# Altium PCB AICat V1.2.PcbDoc (part 2 of 2)
Units mil, origin at the board's own origin, x right, y up, seen from the top; angles counter-clockwise.
Board outline 6000 x 4000 mil, 2 copper layers (Top Layer, Bottom Layer); 86 components, 79 nets, 277 pads, 197 vias.
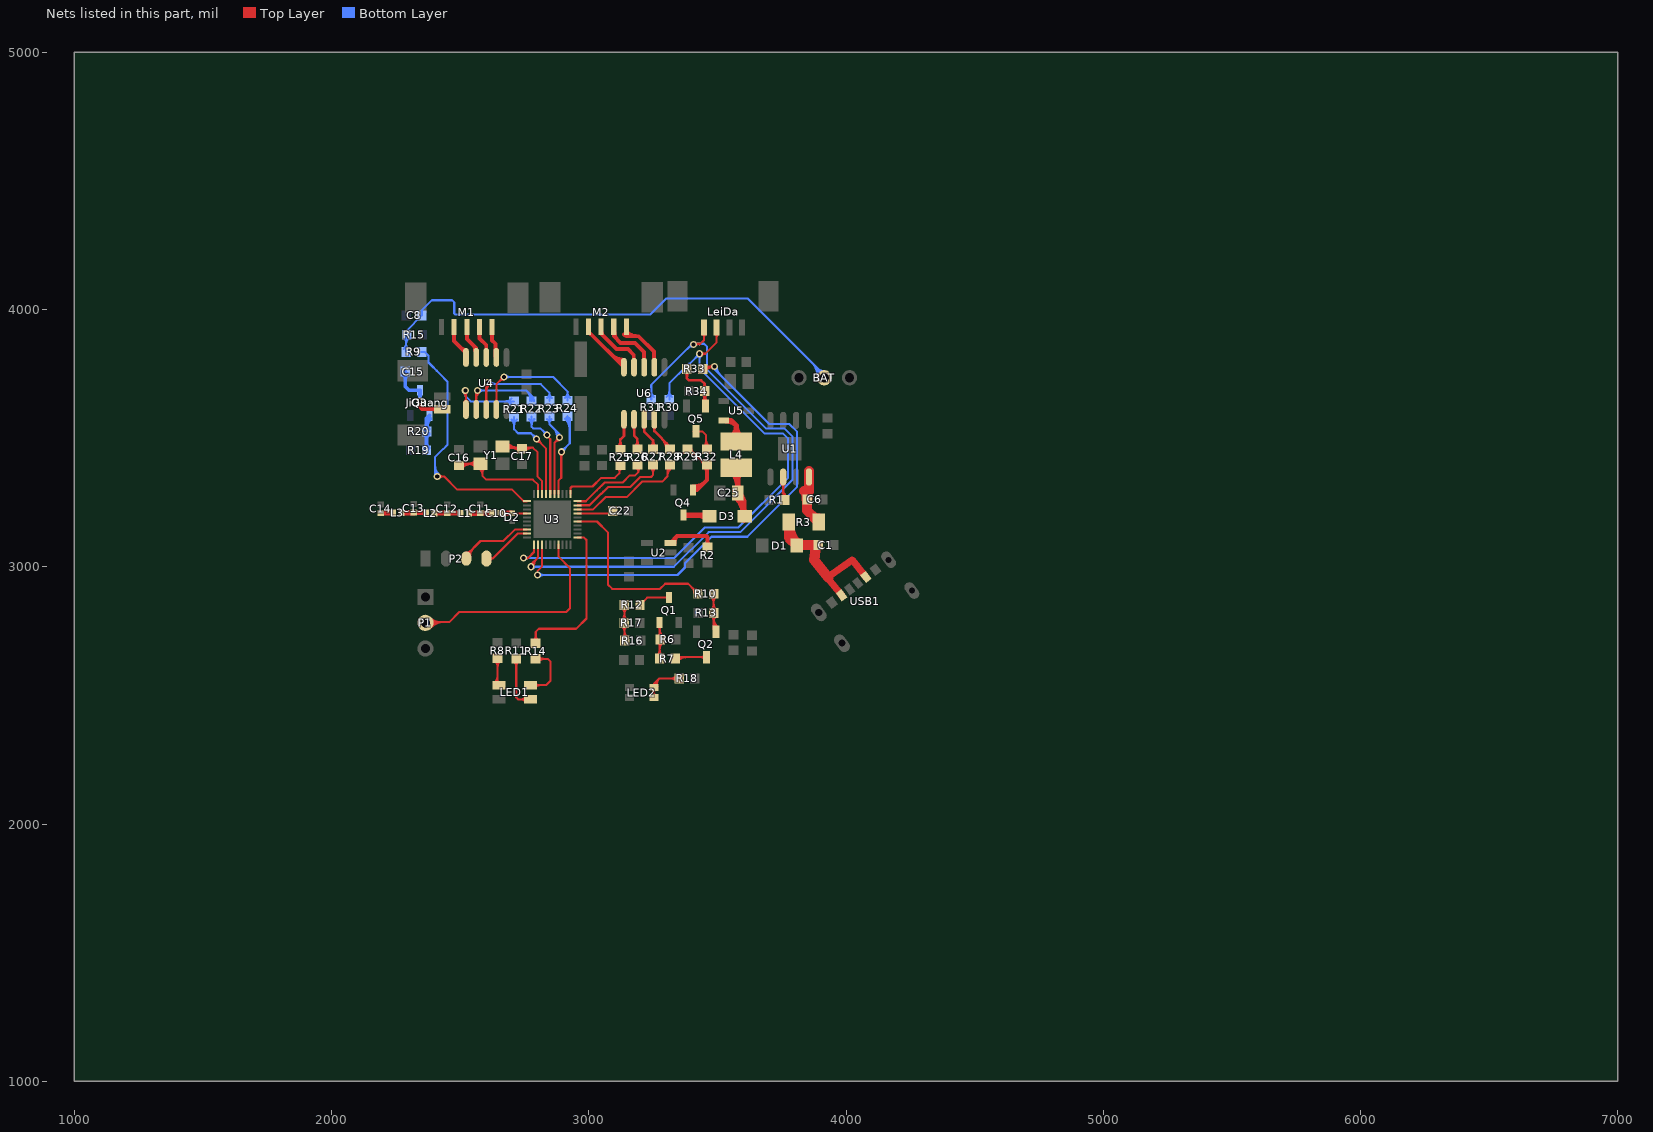
[diagram p2: the nets of this part, all layers, seen from the top]

## Via types
v1: diameter 27.56, hole 15.75, Top Layer to Bottom Layer, tented both sides, 194 vias
v2: diameter 27.56, hole 15.75, Top Layer to Bottom Layer, 3 vias

## Nets (pads, with @x,y where several pads share a name; then routed paths per layer and width w, separated by ;. In a path a pad name is that pad's centre, name@x,y a point inside that pad or via, vN(x,y) a via of type N, cw(c..) or ccw(c..) an arc to the next point about the centre after c; other vN are vias at no path point) (continued)
LED_R: R14.2 U3.11 | length 661.1
  Top Layer w8: R14.2@2783.87,2712.43 ccw(c2759.41,2736.89) 2794,2736.89 ; R14.2@2793,2702.32 2794,2703.32 2794,2747 2806,2759 2951,2759 2991,2799 2991,3104 2981.96,3113.04 U3.11@2956.55,3113.04 ; 2794,2736.82 ccw(c2828.49,2736.82) R14.2@2804.1,2712.43
LEIDA_CON: R33.2 U3.3 | length 2164.5
  Top Layer w8: 2801,2984 2818.78,3001.78 U3.3@2818.78,3085.51 ; R33.2@3437.32,3777 3438.32,3778 v1(3488,3778) ccw(c3488,3734.4) R33.2@3453.6,3761.19 ; R33.2@3447.29,3766.11 cw(c3471.63,3747.16) 3471.63,3778 ; v1@3481.08,3771.08 ccw(c3464.39,3754.39) 3464.39,3778 ccw(c3464.39,3801.61) v1@3481.08,3784.92
  Bottom Layer w8: v1(2801,2968) 3345,2968 3374,2997 3374,3013.49 3477.19,3116.68 3616,3116.68 3809.78,3310.46 3809.78,3525 3779.78,3555 3702,3555 3488,3769 v1(3488,3778) ; v1@2807.92,2961.08 cw(c2824.61,2944.39) 2824.61,2968 cw(c2824.61,2991.61) v1@2807.92,2974.92 ; v1@3489.78,3778 ccw(c3515.8,3778) 3497.4,3759.6 ; v1@3497.78,3778 ccw(c3543.12,3778) 3511.06,3745.94
MOTORA_INA: R21.2 U3.27 | length 524.2
  Top Layer w8: v1@2797,3487.22 cw(c2797,3463.61) 2813.69,3480.31 cw(c2830.39,3497) v1@2806.78,3497 ; v1(2797,3497) 2834.53,3459.47 2834.53,3305 ; U3.27@2834.53,3282.31 2834.53,3305 ; 2834.53,3319.53 2834.53,3305
  Bottom Layer w8: R21.2@2699.88,3572.57 cw(c2675.46,3548.14) 2710,3548.14 cw(c2744.54,3548.14) R21.2@2720.12,3572.57 ; R21.2@2710,3582.68 2710,3534 2725,3519 2775,3519 v1(2797,3497) ; v1@2787.22,3497 ccw(c2763.61,3497) 2780.31,3513.69 ccw(c2797,3530.39) v1@2797,3506.78
MOTORA_INB: R22.2 U3.26 | length 440.7
  Top Layer w8: v1@2834,3512 2850.28,3495.72 U3.26@2850.28,3282.31
  Bottom Layer w8: R22.2@2767.88,3573.57 cw(c2743.46,3549.14) 2778,3549.14 cw(c2812.54,3549.14) R22.2@2788.12,3573.57 ; R22.2@2778,3583.68 2778,3544 2784,3538 2812,3538 v1(2838,3512) ; v1@2828.22,3512 ccw(c2804.61,3512) 2821.31,3528.69 ccw(c2838,3545.39) v1@2838,3521.78
MOTORA_INC: R23.2 U3.25 | length 478.4
  Top Layer w8: U3.25@2866.02,3282.31 2866.02,3481.02 v1(2887,3502) ; v1@2877.22,3502 cw(c2853.61,3502) 2870.31,3485.31 cw(c2887,3468.61) v1@2887,3492.22
  Bottom Layer w8: R23.2@2838.09,3573.49 cw(c2823.36,3555) 2847,3555 ; R23.2@2847,3584.68 2847,3555 ; R23.2@2855.91,3573.49 ccw(c2870.64,3555) 2847,3555 ; 2861.11,3540.89 cw(c2822.23,3502) v1@2877.22,3502 ; 2874.77,3527.23 cw(c2849.54,3502) v1@2885.22,3502 ; v1(2887,3502) 2887,3515 2847,3555
MOTORA_IND: R24.2 U3.24 | length 479.4
  Top Layer w8: U3.24@2881.77,3282.31 2881.77,3334.77 2893,3346 2893,3443 v1@2891.5,3444.5 ; v1@2887.08,3440.08 cw(c2872.8,3425.8) 2893,3425.8 ; 2893,3420.98 cw(c2920.02,3420.98) v1@2900.92,3440.08
  Bottom Layer w8: v1(2894,3447) 2894,3448 2926,3480 2926,3576.68 R24.2@2917,3585.68 ; v1@2894,3456.78 ccw(c2894,3477.98) 2908.99,3462.99 ; v1@2903.78,3447 cw(c2929.8,3447) 2911.4,3465.4 ; R24.2@2907.87,3575.57 cw(c2864.09,3531.79) 2926,3531.79 ; R24.2@2913.52,3581.22 cw(c2883.41,3551.11) 2926,3551.11
MOTORA_OUTA: M1.1 U4.7 | length 141.8
  Top Layer w15: M1.1@2624.43,3931.91 2624.43,3879.57 2637,3867 2637,3817.7 U4.7@2640.83,3813.88 ; 2637,3857.11 ccw(c2658.57,3857.11) U4.7@2643.32,3841.86
MOTORA_OUTB: M1.2 U4.8 | length 128.9
  Top Layer w15: M1.2@2575.22,3931.91 2575.22,3887.78 2601.46,3861.54 U4.8@2601.46,3813.88
MOTORA_OUTC: M1.3 U4.9 | length 159.7
  Top Layer w15: M1.3@2526.01,3931.91 2526.01,3885.99 2562.09,3849.91 U4.9@2562.09,3813.88 ; 2548.61,3863.39 cw(c2524.59,3839.37) U4.9@2558.56,3839.37
MOTORA_OUTD: M1.4 U4.10 | length 199.1
  Top Layer w8: 2473.79,3895.9 cw(c2484.03,3895.9) M1.4@2479.42,3905.04 ; 2473.78,3896.22 M1.4@2473.78,3924.91
  Top Layer w15: M1.4@2476.78,3931.91 2476.78,3877.22 2522.72,3831.28 U4.10@2522.72,3813.88 ; 2502.9,3851.1 ccw(c2522.72,3870.91) U4.10@2522.72,3842.89
MOTORB_INA: R25.2 U3.21 | length 313.2
  Top Layer w8: U3.21@2929.02,3282.31 2929.02,3306.02 2935,3312 3014.47,3312 3048.23,3345.77 3101.77,3345.77 3119,3363 3119,3390.68 R25.2@3123,3394.68 ; R25.2@3111.9,3384.57 cw(c3094.76,3367.42) 3119,3367.42 ; 3119,3362.86 cw(c3142.59,3362.86) R25.2@3129.78,3382.67
MOTORB_INB: R26.2 U3.20 | length 368.5
  Top Layer w8: U3.20@2956.55,3254.78 2988.78,3254.78 3031,3297 ; 3044,3310 3031,3297 ; R26.2@3184.03,3383.18 cw(c3175.55,3367.93) 3193,3367.93 cw(c3216.18,3367.93) R26.2@3200.6,3385.09 ; R26.2@3190,3395.68 3193,3392.68 3193,3368 3180,3355 3160,3355 3132.77,3327.77 3061.77,3327.77 3031,3297
MOTORB_INC: R27.2 U3.19 | length 449
  Top Layer w8: U3.19@2956.55,3239.03 3003.03,3239.03 3047,3283 ; 3056,3292 3047,3283 ; R27.2@3239.88,3386.57 cw(c3215.46,3362.14) 3250,3362.14 cw(c3284.54,3362.14) R27.2@3260.12,3386.57 ; R27.2@3250,3396.68 3250,3357 3242,3349 3228,3349 3199.46,3349 3160.22,3309.77 3074.77,3309.77 3048,3283 3047,3283
MOTORB_IND: R28.2 U3.18 | length 517.1
  Top Layer w8: U3.18@2956.55,3223.28 3017.28,3223.28 3065,3271 3146.91,3271 3206.91,3331 3285,3331 3305.9,3351.9 R28.2@3305.9,3397.43 ; 3305.9,3350.98 cw(c3347.89,3350.98) R28.2@3323.37,3385.07 ; 3305.9,3366.59 cw(c3336.66,3366.59) R28.2@3318.7,3391.56
MOTORB_OUTA: M2.1 U6.7 | length 278
  Top Layer w15: M2.1@3137.47,3902.31 ccw(c3152.71,3917.55) 3152.71,3896 ; M2.1@3146.43,3935.91 3146.43,3900.57 3151,3896 3194,3896 3253.83,3836.17 U6.7@3253.83,3789.88 ; M2.1@3148.08,3912.92 ccw(c3188.92,3953.76) 3188.92,3896
MOTORB_OUTB: M2.2 U6.8 | length 259.3
  Top Layer w15: M2.2@3097.22,3935.91 3097.22,3896.78 3124,3870 3180,3870 3214.46,3835.54 U6.8@3214.46,3789.88 ; M2.2@3099.56,3911.26 ccw(c3140.16,3911.26) 3111.45,3882.55
MOTORB_OUTC: M2.3 U6.9 | length 237
  Top Layer w15: M2.3@3048.01,3935.91 3048.01,3906.99 3108,3847 3152,3847 3175.09,3823.91 U6.9@3175.09,3789.88 ; M2.3@3050.35,3911.26 ccw(c3066.3,3911.26) 3055.02,3899.98
MOTORB_OUTD: M2.4 U6.10 | length 308
  Top Layer w15: M2.4@2998.78,3908.92 cw(c2998.78,3897.12) M2.4@3007.13,3905.46 ; M2.4@2998.78,3935.91 2998.78,3913.81 U6.10@3136.72,3775.88 ; 3087.18,3825.41 ccw(c3136.72,3874.94) U6.10@3136.72,3804.89 ; 3112.79,3799.8 ccw(c3136.72,3823.73) U6.10@3136.72,3789.89
NetANT1_1: C14.2 L3.2 | length 46.6
  Top Layer w19.68: C14.2@2192,3209.27 2237.54,3209.27 L3.2@2238.27,3210
NetBAT1_2: BAT.2 C8.1 R9.1 R15.2 | length 2305.2
  Bottom Layer w8: R9.1@2279.57,3846.1 ccw(c2255.15,3870.52) 2289.69,3870.52 ccw(c2324.23,3870.52) R9.1@2299.8,3846.1 ; R15.2@2281.57,3890.9 cw(c2261.97,3871.3) 2289.69,3871.3 ; R9.1@2289.69,3835 2289.69,3914.05 R15.2@2290.68,3915.05 ; 2289.69,3861.65 cw(c2331.05,3861.65) R15.2@2301.8,3890.9 ; 2289.69,3880.97 cw(c2311.73,3880.97) R15.2@2296.14,3896.56 ; R15.2@2291.68,3902 2291.68,3917.37 C8.1@2351.32,3977 2351.32,3997.32 2390,4036 2469,4036 2477,4028 2477,3985 2482,3980 3238,3980 3301,4043 3618.28,4043 BAT.2@3923.47,3737.81 ; 3864.11,3797.17 cw(c3801.76,3734.81) BAT.2@3889.94,3734.81 ; 3877.77,3783.51 cw(c3829.07,3734.81) BAT.2@3897.94,3734.81 ; 3890.67,3770.61 ccw(c3915.47,3795.41) BAT.2@3915.47,3760.34 ; 3891.43,3769.85 cw(c3856.38,3734.81) BAT.2@3905.94,3734.81
NetC6_2: C6.2 R3.1 U1.4 | length 359
  Top Layer w39.37: 3837.84,3294.16 cw(c3808.24,3264.57) C6.2@3850.06,3262.93 ; C6.2@3847.34,3262.7 cw(c3878.62,3269.38) 3856,3292 ; U1.4@3856,3317 U1.4@3856,3349 ; U1.4@3856,3372 U1.4@3856,3349 ; R3.1@3870.67,3197.07 ccw(c3894.23,3220.63) R3.1@3894.23,3187.32 ; R3.1@3884.69,3183.06 R3.1@3894.23,3173.52 3848.69,3219.06 C6.2@3848.69,3262 3848.69,3283.31 3848,3284 3856,3292 ; 3856,3292 U1.4@3856,3349
NetC10_1: C10.1 D2.1 U3.34 | length 121.8
  Top Layer w8: D2.1@2701.85,3208.05 2702.37,3207.53 U3.34@2759.75,3207.53 ; D2.1@2706.95,3203.85 cw(c2715.84,3194.96) 2715.84,3207.53 ; D2.1@2706.95,3212.26 ccw(c2718.35,3223.66) 2718.35,3207.53
  Top Layer w19.68: C10.1@2657.73,3208 D2.1@2698.9,3208
NetC10_2: C10.2 C11.2 L1.1 | length 90.6
  Top Layer w19.68: L1.1@2534.73,3208 2576.73,3208 C11.2@2578,3209.27 2623,3209.27 C10.2@2624.27,3208
NetC12_2: C12.2 L1.2 L2.1 | length 102.2
  Top Layer w19.68: L2.1@2400.73,3209 2449.27,3209 C12.2@2450,3208.27 2498,3208.27 L1.2@2501.27,3205
NetC13_2: C13.2 L2.2 L3.1 | length 96.2
  Top Layer w19.68: L3.1@2271.73,3210 2319.73,3210 C13.2@2320,3210.27 2366,3210.27 L2.2@2367.27,3209
NetC15_1: C15.1 JiGuang.2 Q3.3 | length 395.6
  Top Layer w15: v1@2339.56,3640.56 cw(c2328.84,3629.84) 2344,3629.84 cw(c2359.16,3629.84) v1@2348.44,3640.56 ; v1(2344,3645) 2344,3621 2352,3613 2429.48,3613 JiGuang.2@2430.09,3612.39 ; 2392.96,3613 cw(c2392.96,3591.02) JiGuang.2@2408.5,3606.56 ; 2395.89,3613 ccw(c2395.89,3630.85) JiGuang.2@2408.5,3618.23
  Bottom Layer w15: C15.1@2279.04,3750.37 cw(c2260.59,3731.93) 2286.68,3731.93 cw(c2312.77,3731.93) C15.1@2294.33,3750.37 ; C15.1@2286.68,3759 2286.68,3701.32 2302.06,3685.94 Q3.3@2343.52,3685.94 2344,3685.46 v1(2344,3645) ; v1@2339.56,3649.44 ccw(c2328.84,3660.16) 2344,3660.16 ccw(c2359.16,3660.16) v1@2348.44,3649.44
NetC22_2: C22.2 U3.17 | length 140.1
  Top Layer w8: U3.17@2956.55,3207.53 3083.22,3207.53 C22.2@3092.69,3217
NetC25_1: C25.1 D3.2 L4.1 | length 602.7
  Top Layer w20: L4.1@3556.02,3366.72 cw(c3500.43,3311.14) C25.1@3579.04,3311.14 ; C25.1@3569.96,3271.82 cw(c3489.15,3191) D3.2@3603.44,3191 ; C25.1@3569.96,3302.18 ccw(c3548.05,3324.09) 3579.04,3324.09 ccw(c3610.03,3324.09) C25.1@3588.12,3302.18 ; C25.1@3579.04,3268.06 cw(c3579.04,3239.24) C25.1@3599.42,3259.62 ; 3579.04,3335.47 cw(c3623.23,3335.47) L4.1@3591.98,3366.72 ; L4.1@3580,3384.7 3579.04,3383.74 3579.04,3280 3603.44,3255.6 D3.2@3603.44,3179.53 ; C25.1@3584.11,3285.96 cw(c3537.43,3239.29) 3603.44,3239.29 ; C25.1@3591.87,3280.9 ccw(c3625.03,3280.9) 3601.58,3257.46 ; D3.2@3592.87,3206.17 ccw(c3567.36,3231.68) 3603.44,3231.68 ; 3603.44,3227.16 ccw(c3633.13,3227.16) D3.2@3612.14,3206.17
NetD3_1: D3.1 Q4.3 | length 155.4
  Top Layer w20: Q4.3@3372.52,3200.06 D3.1@3476.3,3200.06 ; 3424.49,3200.06 cw(c3424.49,3155.13) D3.1@3456.26,3186.9 ; 3441.52,3200.06 ccw(c3441.52,3220.9) D3.1@3456.26,3206.17
NetL4_2: L4.2 U5.2 | length 291.8
  Top Layer w20: U5.2@3524.69,3569.12 3524.81,3569 3553,3569 3574,3548 ; U5.2@3533.95,3567.31 cw(c3533.95,3517.22) 3569.36,3552.64 ; U5.2@3534.38,3567.36 cw(c3541.49,3538.55) 3562.47,3559.53 ; L4.2@3556.16,3505.42 ccw(c3514.28,3548) 3574,3548 ; L4.2@3574,3487.3 L4.2@3574,3493.3 ; L4.2@3580,3487.3 L4.2@3574,3493.3 ; L4.2@3591.84,3505.42 cw(c3633.72,3548) 3574,3548 ; L4.2@3574,3493.3 3574,3548
NetLED1_2: LED1.2 R8.1 | length 226.3
  Top Layer w8: LED1.2@2632.94,2548.14 ccw(c2601.4,2579.68) 2646,2579.68 ; R8.1@2635.88,2633.57 cw(c2611.46,2609.15) 2646,2609.15 cw(c2680.54,2609.15) R8.1@2656.12,2633.57 ; LED1.2@2638.59,2542.49 ccw(c2620.71,2560.37) 2646,2560.37 ; 2646,2558.06 ccw(c2660.02,2558.06) LED1.2@2650.11,2548.14 ; R8.1@2646,2643.69 2646,2544.53 LED1.2@2650.97,2539.56
NetLED1_3: LED1.3 R11.1 | length 309.5
  Top Layer w8: R11.1@2707.88,2632.57 cw(c2683.46,2608.15) 2718,2608.15 cw(c2752.54,2608.15) R11.1@2728.12,2632.57 ; R11.1@2718,2642.69 2718,2492 2726,2484 2772.59,2484 LED1.3@2773.03,2484.44 ; 2733.2,2484 ccw(c2733.2,2514.82) LED1.3@2755,2493.03 ; 2735.33,2484 cw(c2735.33,2456.19) LED1.3@2755,2475.86
NetLED1_4: LED1.4 R14.1 | length 323.6
  Top Layer w8: LED1.4@2773.03,2539.56 2833.56,2539.56 2852,2558 2852,2631 2841,2642 2793.31,2642 R14.1@2793,2641.69 ; LED1.4@2791.06,2530.97 cw(c2811.79,2510.25) 2811.79,2539.56 cw(c2811.79,2568.87) LED1.4@2791.06,2548.14 ; R14.1@2804.1,2631.57 cw(c2829.28,2606.39) 2829.28,2642 ; R14.1@2804.1,2651.8 ccw(c2827.77,2675.47) 2827.77,2642
NetLED2_2: LED2.2 LED2.4 R18.2 | length 386.6
  Top Layer w8: LED2.4@3246.32,2498.23 ccw(c3229.63,2514.92) 3253.24,2514.92 ccw(c3276.85,2514.92) LED2.4@3260.16,2498.23 ; LED2.2@3246.32,2523.77 cw(c3229.63,2507.08) 3253.24,2507.08 cw(c3276.85,2507.08) LED2.2@3260.16,2523.77 ; LED2.2@3249.54,2539.74 ccw(c3247.3,2545.24) 3253.24,2545.24 ; LED2.2@3251.28,2528.7 cw(c3268.88,2534.62) 3255.75,2547.75 ; LED2.4@3253.24,2491.32 LED2.2@3253.24,2530.68 3253.24,2545.24 ; LED2.2@3256.94,2539.74 cw(c3259.18,2545.24) 3253.24,2545.24 ; LED2.2@3258.86,2531.25 cw(c3282.53,2539.22) 3264.87,2556.87 ; LED2.2@3266.45,2533.8 cw(c3296.19,2543.81) 3274,2566 ; R18.2@3341.57,2555.88 ccw(c3317.14,2531.46) 3317.14,2566 ccw(c3317.14,2600.54) R18.2@3341.57,2576.12 ; R18.2@3351.68,2566 3274,2566 ; 3253.24,2545.24 3274,2566
NetQ1_1: Q1.1 R6.2 R7.1 | length 368.6
  Top Layer w8: R7.1@3265.57,2654.1 ccw(c3241.15,2678.52) 3275.69,2678.52 ccw(c3310.23,2678.52) R7.1@3285.8,2654.1 ; R6.2@3267.57,2706.9 cw(c3247.97,2687.3) 3275.69,2687.3 ; R6.2@3267.57,2729.1 ccw(c3247.97,2748.7) 3275.69,2748.7 ; Q1.1@3269.55,2767.92 cw(c3254.75,2753.12) 3275.69,2753.12 ; Q1.1@3275.08,2782.69 3275.69,2782.09 3275.69,2720 R6.2@3277.68,2718 3275.69,2716 R7.1@3275.69,2643 ; 3275.69,2677.65 cw(c3317.05,2677.65) R6.2@3287.8,2706.9 ; 3275.69,2696.97 cw(c3297.73,2696.97) R6.2@3282.14,2712.56 ; 3275.69,2739.03 ccw(c3297.73,2739.03) R6.2@3282.14,2723.44 ; 3275.69,2756.05 cw(c3292.47,2756.05) Q1.1@3280.6,2767.92 ; 3275.69,2758.35 ccw(c3317.05,2758.35) R6.2@3287.8,2729.1
NetQ1_3: Q1.3 R12.1 | length 124.7
  Top Layer w8: R12.1@3199.31,2852 3227.25,2879.94 Q1.3@3312.48,2879.94
NetQ2_1: Q2.1 R10.1 R13.2 | length 385
  Top Layer w8: R10.1@3475.2,2883.9 cw(c3450.77,2859.48) 3485.31,2859.48 cw(c3519.85,2859.48) R10.1@3495.43,2883.9 ; R13.2@3476.2,2809.9 cw(c3454.19,2787.89) 3485.31,2787.89 ; R13.2@3476.2,2832.1 ccw(c3454.19,2854.11) 3485.31,2854.11 ; 3485.31,2783.06 cw(c3523.28,2783.06) R13.2@3496.43,2809.9 ; 3485.31,2784.27 ccw(c3520.64,2784.27) Q2.1@3495.66,2759.3 ; R13.2@3485.31,2803.59 ccw(c3539.95,2803.59) Q2.1@3501.32,2764.95 ; 3485.31,2858.94 ccw(c3523.28,2858.94) R13.2@3496.43,2832.1 ; R10.1@3485.31,2895 3485.31,2756.3 Q2.1@3494.4,2747.21
NetQ2_3: Q2.3 R7.2 | length 239.3
  Top Layer w8: R7.2@3336.32,2643 3342.1,2648.79 Q2.3@3457,2648.79 ; R7.2@3340.78,2639.52 cw(c3363.14,2617.16) 3363.14,2648.79 ; R7.2@3346.43,2633.87 cw(c3382.45,2597.85) 3382.45,2648.79 ; R7.2@3346.43,2654.1 ccw(c3359.26,2666.93) 3359.26,2648.79 ; Q2.3@3450.08,2641.87 ccw(c3433.39,2625.18) 3433.39,2648.79 ccw(c3433.39,2672.4) Q2.3@3450.08,2655.7
NetQ3_1: Q3.1 R19.1 R20.2 | length 302.8
  Bottom Layer w15: R19.1@2361.67,3461.63 ccw(c2343.22,3480.07) 2369.31,3480.07 ccw(c2395.4,3480.07) R19.1@2376.96,3461.63 ; R20.2@2362.67,3517.37 cw(c2346.64,3501.34) 2369.31,3501.34 ; R20.2@2362.67,3534.63 ccw(c2346.64,3550.66) 2369.31,3550.66 ; R19.1@2369.31,3453 2369.31,3577.09 Q3.1@2380.92,3588.69 ; 2369.31,3496.51 cw(c2398.83,3496.51) R20.2@2377.96,3517.37 ; R20.2@2369.31,3541.01 cw(c2419.35,3541.01) Q3.1@2383.97,3576.39 ; 2369.31,3555.49 ccw(c2398.83,3555.49) R20.2@2377.96,3534.63
NetQ4_1: Q4.1 R29.2 R32.1 | length 511.3
  Top Layer w8: R29.2@3378,3458.32 3391.37,3458.32 R32.1@3453,3396.69 ; R29.2@3384.98,3443.01 cw(c3384.98,3390.64) 3422.02,3427.67 ; R29.2@3384.98,3451.01 cw(c3384.98,3417.95) 3408.36,3441.33 ; R29.2@3399.29,3457.32 ccw(c3416,3457.32) 3404.19,3445.5 ; 3425.03,3424.66 ccw(c3458.02,3457.64) R32.1@3458.02,3410.99 ; 3437.14,3412.55 cw(c3421.28,3396.69) R32.1@3443.71,3396.69 ; 3438.69,3411 ccw(c3458.02,3430.33) R32.1@3458.02,3402.99
  Top Layer w15: Q4.1@3404.92,3296.87 ccw(c3404.92,3332.03) 3429.78,3307.17 ; Q4.1@3404.92,3298.31 3420.92,3298.31 3459,3336.39 R32.1@3459,3396.69 ; Q4.1@3404.92,3311.87 ccw(c3404.92,3383.24) 3455.39,3332.77 ; R32.1@3451.36,3389.04 cw(c3432.91,3370.6) 3459,3370.6 cw(c3485.09,3370.6) R32.1@3466.64,3389.04
NetQ5_1: Q5.1 R33.1 R34.2 | length 389.4
  Top Layer w8: R33.1@3376.69,3769 R33.1@3376.69,3777 ; Q5.1@3443.31,3648.3 Q5.1@3452.4,3639.21
  Top Layer w10: R33.1@3372.28,3758.61 cw(c3349.56,3735.89) 3381.69,3735.89 cw(c3413.81,3735.89) R33.1@3391.1,3758.61 ; R33.1@3381.69,3769 3381.69,3732.31 3389,3725 3437,3725 3450.32,3711.68 ; R34.2@3440.91,3672.61 cw(c3418.19,3649.89) 3450.32,3649.89 cw(c3482.44,3649.89) R34.2@3459.73,3672.61 ; R34.2@3442,3694.37 ccw(c3428.14,3711.68) 3450.32,3711.68 ; Q5.1@3450.32,3625.21 3450.32,3711.68 ; R34.2@3450.32,3667.1 ccw(c3485.46,3667.1) Q5.1@3460.61,3642.25 ; R34.2@3458.63,3694.37 cw(c3472.49,3711.68) 3450.32,3711.68
NetQ5_3: Q5.3 R32.2 | length 182.8
  Top Layer w8: Q5.3@3408,3525 3443,3525 3455,3513 3455,3459.32 R32.2@3453,3457.32 ; R32.2@3447.9,3467.43 ccw(c3430.76,3484.58) 3455,3484.58 ; 3455,3479.82 ccw(c3480.52,3479.82) R32.2@3462.48,3461.78 ; 3455,3499.14 ccw(c3499.84,3499.14) R32.2@3468.13,3467.43
NetR1_2: R1.2 U1.2 | length 170.1
  Top Layer w10: U1.2@3751.05,3322.59 cw(c3739.1,3310.64) 3756,3310.64 cw(c3772.9,3310.64) U1.2@3760.95,3322.59 ; 3754.96,3288.04 cw(c3739.96,3273.04) R1.2@3758.44,3262.61 ; U1.2@3756,3372 3756,3287 3761,3282 ; 3758.17,3284.83 cw(c3746.99,3273.65) R1.2@3758.84,3263.17
NetR2_2: R2.2 U2.3 | length 266.8
  Top Layer w15: U2.3@3317.17,3092.73 3343.44,3119 ; U2.3@3333.29,3092.92 cw(c3368.03,3094.41) 3343.44,3119 ; R2.2@3454.36,3082.96 ccw(c3435.91,3101.41) 3462,3101.41 ccw(c3488.09,3101.41) R2.2@3469.64,3082.96 ; R2.2@3462,3075.32 3462,3115 3458,3119 3343.44,3119
NetR12_2: R12.2 R16.2 R17.1 | length 374.2
  Top Layer w8: R17.1@3127.57,2770.9 cw(c3100.74,2744.07) 3138.68,2744.07 ; R17.1@3127.57,2793.1 ccw(c3100.74,2819.93) 3138.68,2819.93 ; R12.2@3128.57,2840.9 cw(c3104.14,2816.48) 3138.68,2816.48 cw(c3173.22,2816.48) R12.2@3148.8,2840.9 ; R16.2@3130.57,2724.1 ccw(c3110.97,2743.7) 3138.68,2743.7 ; 3138.68,2734.04 ccw(c3160.74,2734.04) R16.2@3145.14,2718.44 ; 3138.68,2748.88 cw(c3169.82,2748.88) R17.1@3147.8,2770.9 ; 3138.68,2753.35 ccw(c3180.05,2753.35) R16.2@3150.8,2724.1 ; 3138.68,2815.12 ccw(c3169.82,2815.12) R17.1@3147.8,2793.1 ; R12.2@3138.68,2852 3138.68,2715 R16.2@3140.68,2713
NetR21_1: R21.1 U4.1 | length 442.9
  Top Layer w8: v1@2513.08,3678.08 cw(c2489.83,3654.83) 2522.72,3654.83 ; U4.1@2517.75,3641.97 ccw(c2505.76,3653.96) 2522.72,3653.96 ccw(c2539.67,3653.96) U4.1@2527.68,3641.97 ; v1(2520,3685) 2522.72,3682.28 U4.1@2522.72,3611.52 ; 2522.72,3667.95 cw(c2537.05,3667.95) v1@2526.92,3678.08
  Bottom Layer w8: v1@2513.71,3677.51 cw(c2502.34,3664) 2520,3664 ; v1(2520,3685) 2520,3664 ; v1@2526.29,3677.51 ccw(c2537.66,3664) 2520,3664 ; R21.1@2698.9,3633.2 ccw(c2674.48,3608.77) 2674.48,3643.31 ccw(c2674.48,3677.85) R21.1@2698.9,3653.43 ; R21.1@2710,3643.31 2540.69,3643.31 2520,3664
NetR22_1: R22.1 U4.2 | length 525.1
  Top Layer w8: U4.2@2557.12,3641.97 ccw(c2545.13,3653.96) 2562.09,3653.96 ccw(c2579.04,3653.96) U4.2@2567.05,3641.97 ; U4.2@2562.09,3611.52 2562.09,3680.09 v1(2567,3685) ; 2562.09,3649.53 cw(c2602.47,3649.53) v1@2573.92,3678.08 ; 2562.09,3668.84 cw(c2583.16,3668.84) v1@2568.26,3683.74
  Bottom Layer w8: v1(2567,3685) 2758,3685 2778,3665 R22.1@2778,3644.31 ; v1@2573.92,3678.08 cw(c2590.61,3661.39) 2590.61,3685 cw(c2590.61,3708.61) v1@2573.92,3691.92 ; 2758.15,3684.85 cw(c2726.13,3652.83) R22.1@2770.8,3645.35 ; 2769.14,3673.86 cw(c2744.95,3649.68) R22.1@2778.69,3644.03 ; 2780.12,3662.88 cw(c2763.77,3646.53) R22.1@2786.58,3642.71
NetR23_1: R23.1 U4.3 | length 569
  Top Layer w8: U4.3@2596.49,3641.97 ccw(c2584.5,3653.96) 2601.46,3653.96 ccw(c2618.41,3653.96) U4.3@2606.42,3641.97 ; U4.3@2601.46,3611.52 2601.46,3710.46 v1(2607,3716) ; 2601.46,3679.01 cw(c2643.99,3679.01) v1@2613.92,3709.08 ; 2601.46,3698.32 cw(c2624.68,3698.32) v1@2608.26,3714.74
  Bottom Layer w8: v1@2608.26,3717.26 ccw(c2625.25,3734.25) 2625.25,3710.22 ; v1@2608.78,3710.22 2813.78,3710.22 2847,3677 ; v1@2613.92,3722.92 ccw(c2644.56,3753.56) 2644.56,3710.22 ; R23.1@2837.54,3656.05 ccw(c2819.07,3677) 2847,3677 ; R23.1@2847,3645.31 2847,3677 ; R23.1@2856.46,3656.05 cw(c2874.93,3677) 2847,3677
NetR24_1: R24.1 U4.4 | length 594.3
  Top Layer w8: U4.4@2635.86,3641.97 ccw(c2623.87,3653.96) 2640.83,3653.96 ccw(c2657.78,3653.96) U4.4@2645.79,3641.97 ; U4.4@2640.83,3611.52 2640.83,3708.83 v1(2670,3738) ; v1@2660.22,3738 cw(c2636.61,3738) 2653.31,3721.31 cw(c2670,3704.61) v1@2670,3728.22
  Bottom Layer w8: v1(2670,3738) 2861,3738 2919,3680 2917,3678 ; v1@2676.92,3731.08 cw(c2693.61,3714.39) 2693.61,3738 cw(c2693.61,3761.61) v1@2676.92,3744.92 ; R24.1@2907.54,3657.05 ccw(c2889.07,3678) 2917,3678 ; R24.1@2917,3646.31 2917,3678 ; R24.1@2926.46,3657.05 cw(c2944.93,3678) 2917,3678
NetR25_1: R25.1 U6.1 | length 197.4
  Top Layer w10: R25.1@3113.59,3464.72 ccw(c3090.87,3487.44) 3123,3487.44 ccw(c3155.13,3487.44) R25.1@3132.41,3464.72 ; R25.1@3123,3455.31 3123,3495 3137,3509 3137,3573.23 U6.1@3136.72,3573.52 ; U6.1@3132.46,3543.76 cw(c3121.49,3532.8) 3137,3532.8 ; 3137,3534.17 cw(c3150.57,3534.17) U6.1@3140.98,3543.76
NetR26_1: R26.1 U6.2 | length 196.3
  Top Layer w10: U6.2@3171.83,3543.76 cw(c3161.54,3533.48) 3176.09,3533.48 cw(c3190.63,3533.48) U6.2@3180.35,3543.76 ; U6.2@3176.09,3573.52 3176.09,3509.91 3189,3497 3189,3457.31 R26.1@3190,3456.31 ; R26.1@3179.61,3465.72 ccw(c3156.93,3488.4) 3189,3488.4 ; 3189,3488.48 ccw(c3221.18,3488.48) R26.1@3198.43,3465.72
NetR27_1: R27.1 U6.3 | length 203.8
  Top Layer w10: U6.3@3211.2,3543.76 cw(c3200.91,3533.48) 3215.46,3533.48 cw(c3230,3533.48) U6.3@3219.72,3543.76 ; U6.3@3215.46,3573.52 3215.46,3525.54 3250,3491 R27.1@3250,3457.31 ; R27.1@3240.59,3466.72 ccw(c3217.87,3489.44) 3250,3489.44 ccw(c3282.13,3489.44) R27.1@3259.41,3466.72
NetR28_1: R28.1 U6.4 | length 236.6
  Top Layer w8: R28.1@3305.9,3458.06 R28.1@3305.9,3462.1
  Top Layer w10: U6.4@3250.57,3543.76 cw(c3240.28,3533.48) 3254.83,3533.48 cw(c3269.37,3533.48) U6.4@3259.09,3543.76 ; U6.4@3254.83,3573.52 3254.83,3527.17 3316,3466 R28.1@3316,3457.31 ; 3285.46,3496.54 cw(c3246.24,3457.31) R28.1@3301.71,3457.31 ; 3302.53,3479.47 cw(c3280.38,3457.31) R28.1@3311.71,3457.31
NTC_CON: R9.2 U3.31 | length 1063
  Top Layer w8: v1(2411,3351) 2438,3351 2489,3300 2702,3300 2747.22,3254.78 U3.31@2759.75,3254.78 ; v1@2417.92,3344.08 cw(c2434.61,3327.39) 2434.61,3351 cw(c2434.61,3374.61) v1@2417.92,3357.92
  Bottom Layer w8: R9.2@2350.32,3835 2363,3835 2377,3821 2377,3794 2420,3751 ; 2403,3374.61 ccw(c2434.61,3374.61) v1@2412.26,3352.26 ; 2403,3393.92 ccw(c2453.92,3393.92) v1@2417.92,3357.92 ; 2409,3762 2420,3751 ; v1(2411,3351) 2403,3359 2403,3427 2433,3457 2434,3457 2451,3474 2451,3720 2420,3751
RX_DEBUG: P2.3 U3.38 | length 373
  Top Layer w8: P2.3@2523.48,3032 2523.48,3044.48 2579,3100 2668,3100 2712.54,3144.54 U3.38@2759.75,3144.54 ; P2.3@2523.48,3055.56 ccw(c2523.48,3082.31) 2542.39,3063.39 ; P2.3@2531.17,3039.87 cw(c2560.84,3039.87) 2539.86,3060.86 ; P2.3@2539.17,3039.87 cw(c2588.15,3039.87) 2553.51,3074.51
RX_LEIDA: LeiDa.4 R31.1 U3.2 | length 2663.9
  Top Layer w8: v1@2777.78,3000 cw(c2806.22,3000) 2786.11,3020.11 ; 2782,3016 2803.03,3037.03 2803.03,3047 U3.2@2803.03,3085.51 ; v1@2785.78,3000 cw(c2833.53,3000) 2799.77,3033.77 ; v1@3407,3867 3434,3867 3448.16,3881.16 LeiDa.4@3448.16,3929.98 ; v1@3413.92,3860.08 cw(c3430.61,3843.39) 3430.61,3867 ; v1@3413.92,3871.92 ccw(c3430.61,3888.61) 3430.61,3865 ; LeiDa.4@3442.64,3904.77 cw(c3429.31,3891.44) 3448.16,3891.44 cw(c3467.02,3891.44) LeiDa.4@3453.69,3904.77
  Bottom Layer w8: v1(2776,3000) 3331,3000 3465.68,3134.68 3589.14,3134.68 3791.78,3337.32 3791.78,3506.96 3761.74,3537 3689.71,3537 3460.22,3766.49 3460.22,3854.78 3448,3867 3407,3867 3403,3867 3243,3707 R31.1@3243,3650.31 ; v1@2782.92,2993.08 cw(c2799.61,2976.39) 2799.61,3000 cw(c2799.61,3023.61) v1@2782.92,3006.92 ; R31.1@3232.88,3660.43 ccw(c3208.46,3684.85) 3243,3684.85 ccw(c3277.54,3684.85) R31.1@3253.12,3660.43 ; 3383.48,3847.48 cw(c3407,3823.95) v1@3407,3857.22 ; 3393.13,3857.13 ccw(c3383.27,3867) v1@3397.22,3867 ; v1@3413.92,3860.08 cw(c3430.61,3843.39) 3430.61,3867 ; v1@3413.92,3871.92 ccw(c3430.61,3888.61) 3430.61,3865
  other v1: 3407,3864
SWS: P1.3 U3.7 | length 1058.9
  Top Layer w8: P1.3@2365,2782 2368,2785 2457,2785 2496,2824 2568,2824 2912,2824 2927,2839 2927,2995 2881.77,3040.23 U3.7@2881.77,3085.51 ; P1.3@2373.13,2773.87 cw(c2400,2747) 2400,2785 ; P1.3@2378.79,2768.21 cw(c2419.31,2727.69) 2419.31,2785 ; P1.3@2378.79,2795.79 ccw(c2404.82,2821.82) 2404.82,2785 ; P1.3@2384.44,2762.56 cw(c2438.62,2708.38) 2438.62,2785 ; P1.3@2384.44,2801.44 ccw(c2424.14,2841.14) 2424.14,2785
TX_DEBUG: P2.4 U3.39 | length 221.4
  Top Layer w8: P2.4@2602.22,3032 2626,3032 ; P2.4@2616.64,3025.83 cw(c2626,3021.82) 2626,3032 ; P2.4@2616.64,3038.17 ccw(c2626,3042.18) 2626,3032 ; U3.39@2759.75,3128.79 2722.79,3128.79 2626,3032
TX_LEIDA: LeiDa.3 R30.1 U3.1 | length 2537.4
  Top Layer w8: v1(2746,3034) 2764,3034 ; v1@2754.2,3028.68 cw(c2764,3022.33) 2764,3034 ; v1@2754.2,3039.32 ccw(c2764,3045.67) 2764,3034 ; U3.1@2787.28,3085.51 2787.28,3057.28 2764,3034 ; v1(3431,3828) 3453,3828 ; v1@3438.26,3821.45 cw(c3453,3808.15) 3453,3828 ; v1@3438.26,3834.55 ccw(c3453,3847.85) 3453,3828 ; LeiDa.3@3491.86,3904.77 cw(c3478.53,3891.44) 3497.38,3891.44 cw(c3516.24,3891.44) LeiDa.3@3502.91,3904.77 ; LeiDa.3@3497.39,3929.98 3497.39,3872.39 3453,3828
  Bottom Layer w8: v1(2746,3034) 3332,3034 3450.68,3152.68 3581.68,3152.68 3773.78,3344.78 3773.78,3499.51 3755.51,3517.78 3683.48,3517.78 3431,3770.26 v1(3431,3828) 3385.14,3782.14 3381.86,3782.14 ; v1@2752.92,3027.08 cw(c2769.61,3010.39) 2769.61,3034 cw(c2769.61,3057.61) v1@2752.92,3040.92 ; R30.1@3302.88,3660.43 ccw(c3278.46,3684.85) 3313,3684.85 ccw(c3347.54,3684.85) R30.1@3323.12,3660.43 ; R30.1@3313,3650.31 3313,3713.29 3381.86,3782.14 ; 3390.29,3790.57 3381.86,3782.14 ; v1@3421.22,3828 cw(c3397.61,3828) 3414.31,3811.31 cw(c3431,3794.61) v1@3431,3818.22 ; v1@3424.08,3821.08 cw(c3407.39,3804.39) 3431,3804.39 cw(c3454.61,3804.39) v1@3437.92,3821.08
V_BAT_CON: R10.2 U3.15 | length 774.5
  Top Layer w8: U3.15@2956.55,3176.04 3031.96,3176.04 3074,3134 3074,2931 3091,2914 3277,2914 3297,2934 3386,2934 3424.68,2895.32 R10.2@3424.68,2895 ; 3399.12,2920.88 ccw(c3424.68,2946.44) R10.2@3424.68,2910.29 ; 3400.73,2919.27 cw(c3377.45,2895.98) R10.2@3410.38,2895.98
VCC_USB: C1.2 D1.2 R3.2 USB1.A9 USB1.B9 | length 728.9
  Top Layer w27.56: 3929.72,2955.9 USB1.B9@3982.82,2889.2 ; 3930.04,2959.98 4024.04,3026.98 USB1.A9@4077.14,2960.28
  Top Layer w39.37: R3.2@3777.79,3169.9 ccw(c3892.08,3169.9) D1.2@3811.27,3089.09 ; R3.2@3777.79,3173.52 3777.79,3113.06 D1.2@3808.48,3082.37 3810.11,3084 C1.2@3883,3084 ; C1.2@3881,3066.34 cw(c3907.34,3063.35) C1.2@3890.83,3084.09 ; C1.2@3891.69,3084 C1.2@3883,3084 ; 3930.76,2958.66 3876.51,3026.81 C1.2@3883,3084
XC1: C16.2 U3.29 Y1.1 | length 697.3
  Top Layer w8: C16.2@2496,3393.69 2502.93,3400.62 2586.56,3400.62 2586.56,3354.44 2602,3339 2783,3339 2803.03,3318.97 U3.29@2803.03,3282.31 ; C16.2@2501.44,3389.23 cw(c2528.94,3361.73) 2528.94,3400.62 ; C16.2@2507.1,3383.57 cw(c2548.26,3342.41) 2548.26,3400.62 ; C16.2@2507.1,3403.8 ccw(c2514.79,3411.49) C16.2@2514.79,3400.62 ; Y1.1@2560.74,3386.74 ccw(c2527.25,3353.25) 2527.25,3400.62 ccw(c2527.25,3447.99) Y1.1@2560.74,3414.49 ; Y1.1@2566.4,3392.4 ccw(c2546.56,3372.56) 2546.56,3400.62 ccw(c2546.56,3428.68) Y1.1@2566.4,3408.83 ; Y1.1@2571,3384.72 cw(c2548.98,3354.27) 2586.56,3354.27 ; Y1.1@2575.68,3391.2 cw(c2560.3,3369.92) 2586.56,3369.92 ; 2586.56,3363.05 cw(c2620.06,3363.05) Y1.1@2596.37,3386.74
XC2: C17.2 U3.28 Y1.3 | length 563.8
  Top Layer w8: Y1.3@2673.18,3467.55 2677.72,3463 2783,3463 ; Y1.3@2677.33,3475.76 ccw(c2708.15,3506.58) 2708.15,3463 ; Y1.3@2682.99,3453.67 cw(c2705.51,3431.15) 2705.51,3463 ; Y1.3@2682.99,3481.42 ccw(c2727.46,3525.9) C17.2@2727.46,3463 ; 2696.58,3463 cw(c2696.58,3415.87) C17.2@2729.9,3449.2 ; 2714.37,3463 ccw(c2714.37,3484.96) C17.2@2729.9,3469.43 ; 2715.89,3463 cw(c2715.89,3435.19) C17.2@2735.56,3454.85 ; C17.2@2746.62,3455.04 cw(c2764.76,3438.35) 2764.76,3463 ; C17.2@2752.1,3469.43 ccw(c2767.63,3484.96) 2767.63,3463 ; C17.2@2752.51,3449.63 cw(c2783,3421.57) 2783,3463 ; U3.28@2818.78,3282.31 2818.78,3332.78 2801,3350.56 2801,3445 2783,3463
pads on no net: LeiDa.5 LeiDa.6 M1.6 M1.7 M2.6 M2.7 U2.4 U3.8 U3.33 U3.35 U3.36 U3.37 U3.40

## Polygon pours and split planes (outlines as drawn)
GND on Top Layer "Bottom Layer-No Net" (solid, remove dead copper): 2169,3924 2171,3922 3695,3922 3695,4120.82 3697,4122.82 4102.58,4122.82 4102.58,3230.34 4324,3008.92 4324,2889 4321,2889 4252,2820 3840,2408 2496,2408 2301.81,2408 2169.27,2540.54
GND on Bottom Layer "Bottom Layer-No Net" (solid, remove dead copper): 2169,4122.82 2169.27,4122.55 2169.27,2540.54 2169.46,2540.54 2254,2456 2305,2405 3565,2405 3815,2405 4292,2882 4295,2885 4295,2955 4295,3029 4103,3221 4102.58,3221.42 4102.58,4122.82

## Keep-outs
Keep-Out Layer:
  circle w1: c3806.48,2666.13 r31.5
  circle w1: c3984.28,3217.31 r31.5
  circle w1: c3669.32,2902.35 r53.15
  circle w1: c3944.91,3965.34 r53.15
  circle w1: c1976.41,2862.98 r53.15
  circle w1: c1976.41,3965.34 r53.15
  lines w1: 4286.83,2875.96 ccw(c4255,2899.14) 4286.3,2923.02 4142.93,3110.94 cw(c4299.43,3230.34) 4102.58,3230.34 4102.58,4122.82 1818.74,4122.82 1818.74,2728.33 ccw(c2679.84,3926.4) 1858.48,2700.74 ccw(c2686.85,3936.82) 1932.15,2654.44 1953.62,2642.03 1969.68,2633.07 1983.97,2625.29 1996.46,2618.66 2007.11,2613.11 2017.83,2607.63 ccw(c2739.99,4034.61) 2085.88,2575.19 2108.6,2565.21 2126.41,2557.68 2142.33,2551.15 2156.27,2545.59 2169.27,2540.54 2181.3,2535.97 2193.43,2531.47 2206.8,2526.63 2221.41,2521.47 2237.32,2516.03 2254.54,2510.31 2273.11,2504.37 2294.25,2497.86 2318.04,2490.87 2345.77,2483.16 2366.52,2477.68 2375.12,2475.48 2383.76,2473.32 2393.67,2470.89 2403.62,2468.5 2414.86,2465.87 2426.15,2463.29 2438.74,2460.5 2452.66,2457.51 2467.9,2454.35 2485.76,2450.8 2507.56,2446.68 2539.79,2441.01 2566.98,2436.62 2574.77,2435.43 2583.86,2434.07 2592.96,2432.76 2602.07,2431.47 2611.17,2430.23 2621.59,2428.85 2632,2427.52 2642.41,2426.24 2654.12,2424.85 2667.13,2423.37 2680.12,2421.97 2694.39,2420.51 2711.23,2418.9 2730.6,2417.18 2757.6,2415.04 2783.15,2413.28 2802.21,2412.13 2818.67,2411.25 2833.8,2410.53 2847.62,2409.94 2860.16,2409.48 2871.41,2409.11 2882.65,2408.78 2892.61,2408.54 2902.55,2408.32 2912.48,2408.14 2921.15,2408.02 2929.82,2407.92 2938.47,2407.84 2945.87,2407.79 2953.27,2407.77 2960.66,2407.76 2968.05,2407.77 2975.44,2407.79 2982.85,2407.84 2991.5,2407.92 3000.16,2408.02 3008.83,2408.14 3018.76,2408.32 3028.71,2408.54 3038.67,2408.78 3049.9,2409.11 3061.15,2409.48 3073.69,2409.94 3087.52,2410.53 3102.65,2411.25 3119.1,2412.13 3138.16,2413.28 3163.72,2415.04 3190.72,2417.18 3210.09,2418.9 3226.92,2420.51 3241.2,2421.97 3254.19,2423.37 3267.19,2424.85 3278.9,2426.24 3289.32,2427.52 3299.73,2428.85 3310.14,2430.23 3319.25,2431.47 3328.35,2432.76 3337.45,2434.07 3346.54,2435.43 3354.33,2436.62 3381.53,2441.01 3413.75,2446.68 3435.55,2450.8 3453.41,2454.35 3468.66,2457.51 3482.57,2460.5 3495.17,2463.29 3506.45,2465.87 3517.69,2468.5 3527.64,2470.89 3537.55,2473.32 3546.19,2475.48 3554.79,2477.68 3575.54,2483.16 3603.27,2490.87 3627.06,2497.86 3648.2,2504.37 3666.78,2510.31 3684,2516.03 3699.9,2521.47 3714.52,2526.63 3727.88,2531.47 3740.02,2535.97 3752.05,2540.54 3765.05,2545.59 3778.99,2551.15 3794.9,2557.68 3812.72,2565.21 3835.44,2575.19 ccw(c3181.32,4034.61) 3903.48,2607.63 3914.2,2613.11 3924.85,2618.66 3937.34,2625.29 3951.64,2633.07 3967.69,2642.03 3989.17,2654.44 ccw(c3234.47,3936.82) 4062.83,2700.74 ccw(c3241.48,3926.4) 4102.58,2728.33 4287.7,2874.81

## Other copper
Top Layer:
  rectangle net BAT+: 3784,3695 3850,3777
  rectangle net GND: 3530,3899 3561,4106
  rectangle net GND: 2212,3730 2445,3801
  rectangle net GND: 2169.15,3053 2211,3142.18
  rectangle net NetBAT1_2: 3883,3695 3947,3777
  rectangle net BAT+: 3214,3905 3264,3942
  rectangle net BAT+: 2399,3819 2449,4010
  rectangle net BAT+: 2904,3886 2943,3946
  rectangle net BAT+: 2904,3739 2974,3955
  rectangle net BAT+: 2670,3779 2937,3927
  rectangle net BAT+: 3243,3887 3312,3954
  rectangle net BAT+: 3278,3740 3312,3945
  rectangle net GND: 3669,3405 4005,3507
  rectangle net GND: 3976,3359 4080,3818
  region: 1891.27,3126.89 1891.27,3107.2 2178,3107.2 2178,3126.89
  region net NetANT1_1: 2181,3199.71 2181,3219.4 1894.37,3219.4 1894.37,3199.71
  region: 1902.55,3311.7 1882.87,3311.7 1882.87,3107.2 1902.55,3107.2
  region: 2037.27,3292.01 2037.27,3311.7 1883.07,3311.7 1883.07,3292.01
  region: 2040.45,3402.2 2020.77,3402.2 2020.77,3292.1 2040.45,3292.1
  region: 2040.47,3383.61 2040.47,3403.3 1883.77,3403.3 1883.77,3383.61
  region: 1902.67,3493.6 1882.98,3493.6 1882.98,3383.5 1902.67,3383.5
  region: 2039.47,3474.81 2039.47,3494.5 1882.97,3494.5 1882.97,3474.81
  region: 2040.45,3584.9 2020.77,3584.9 2020.77,3474.8 2040.45,3474.8
  region: 2040.47,3566.41 2040.47,3586.1 1882.57,3586.1 1882.57,3566.41
  region: 1902.25,3677.8 1882.57,3677.8 1882.57,3567.3 1902.25,3567.3
  region: 1898.17,3383.5 1898.17,3403.23 1882.97,3403.23 1882.97,3383.5
  region: 2092.27,3658.11 2092.27,3677.8 1882.57,3677.8 1882.57,3658.11
Bottom Layer:
  rectangle net BAT+: 3783,3694 3849,3778
  rectangle net NetBAT1_2: 3885,3704 3947.43,3778
  rectangle net BAT+: 2417,3819 2449,3836
  rectangle net BAT+: 2408,3836 2449,3928
  rectangle net BAT+: 2399,3917 2456,4007
  rectangle net GND: 3969,3296 4082,3821

## Silkscreen, mask and mechanical layers (free items; w line width, h text height)
Top Overlay:
  circle w1: c3673,2903 r108.27
  circle w1: c3943,3968 r108.27
  circle w20: c3109,3519 r10
  circle w20: c2491,3569 r10
  circle w1: c1973,3965 r108.27
  circle w1: c1977,2862 r108.27
  lines w1: 2276.41,4122.82 2276.41,3965.34 2488.22,3965.34 2488.22,4122.82 ; 2527.59,4122.82 2527.59,3965.34 2921.29,3965.34 2921.29,4122.82 ; 2960.66,4122.82 2960.66,3965.34 3283.06,3965.34 3283.06,4122.82 ; 3314.99,4122.82 3314.99,3965.34 3708.69,3965.34 3708.69,4122.82 ; 3854.07,2946.64 4089.77,2637.71 ; 3861.38,2852.68 4049.08,2606.66 4329.22,2820.4 4141.51,3066.42 ; 4052.82,3098.28 4288.53,2789.35 ; 2645.7,2457.47 2783.49,2457.47 2783.49,2567.7 2645.7,2567.7 2645.7,2457.47 ; 3137.82,2457.47 3275.62,2457.47 3275.62,2567.7 3137.82,2567.7 3137.82,2457.47
  text "B+" at 3750,3857 h60 r180
  text "B-" at 3983,3848 h60 r180
  text "NTC" at 3878,3796 h30
  text "GND" at 2414,3100 h30
  text "3V3" at 2307,3098 h30
  text "3V3" at 2437,2876 h30
  text "SWS" at 2433,2772 h30
  text "GND" at 2430,2662 h30
  text "G" at 2589,2468 h30
Bottom Overlay:
  text "B+" at 3826,3805 h30
  text "B-" at 4038,3804 h30
  text "NTC" at 3953,3800 h30